# Altium PCB PCB_TUD-EnergyHarvestingConsole_1.pcbdoc (part 1 of 2)
Units mm, origin at the board's own origin, x right, y up, seen from the top; angles counter-clockwise.
Board outline 313.3 x 236.5 mm, 2 copper layers (Top Layer, Bottom Layer); 229 components, 132 nets, 925 pads, 303 vias.
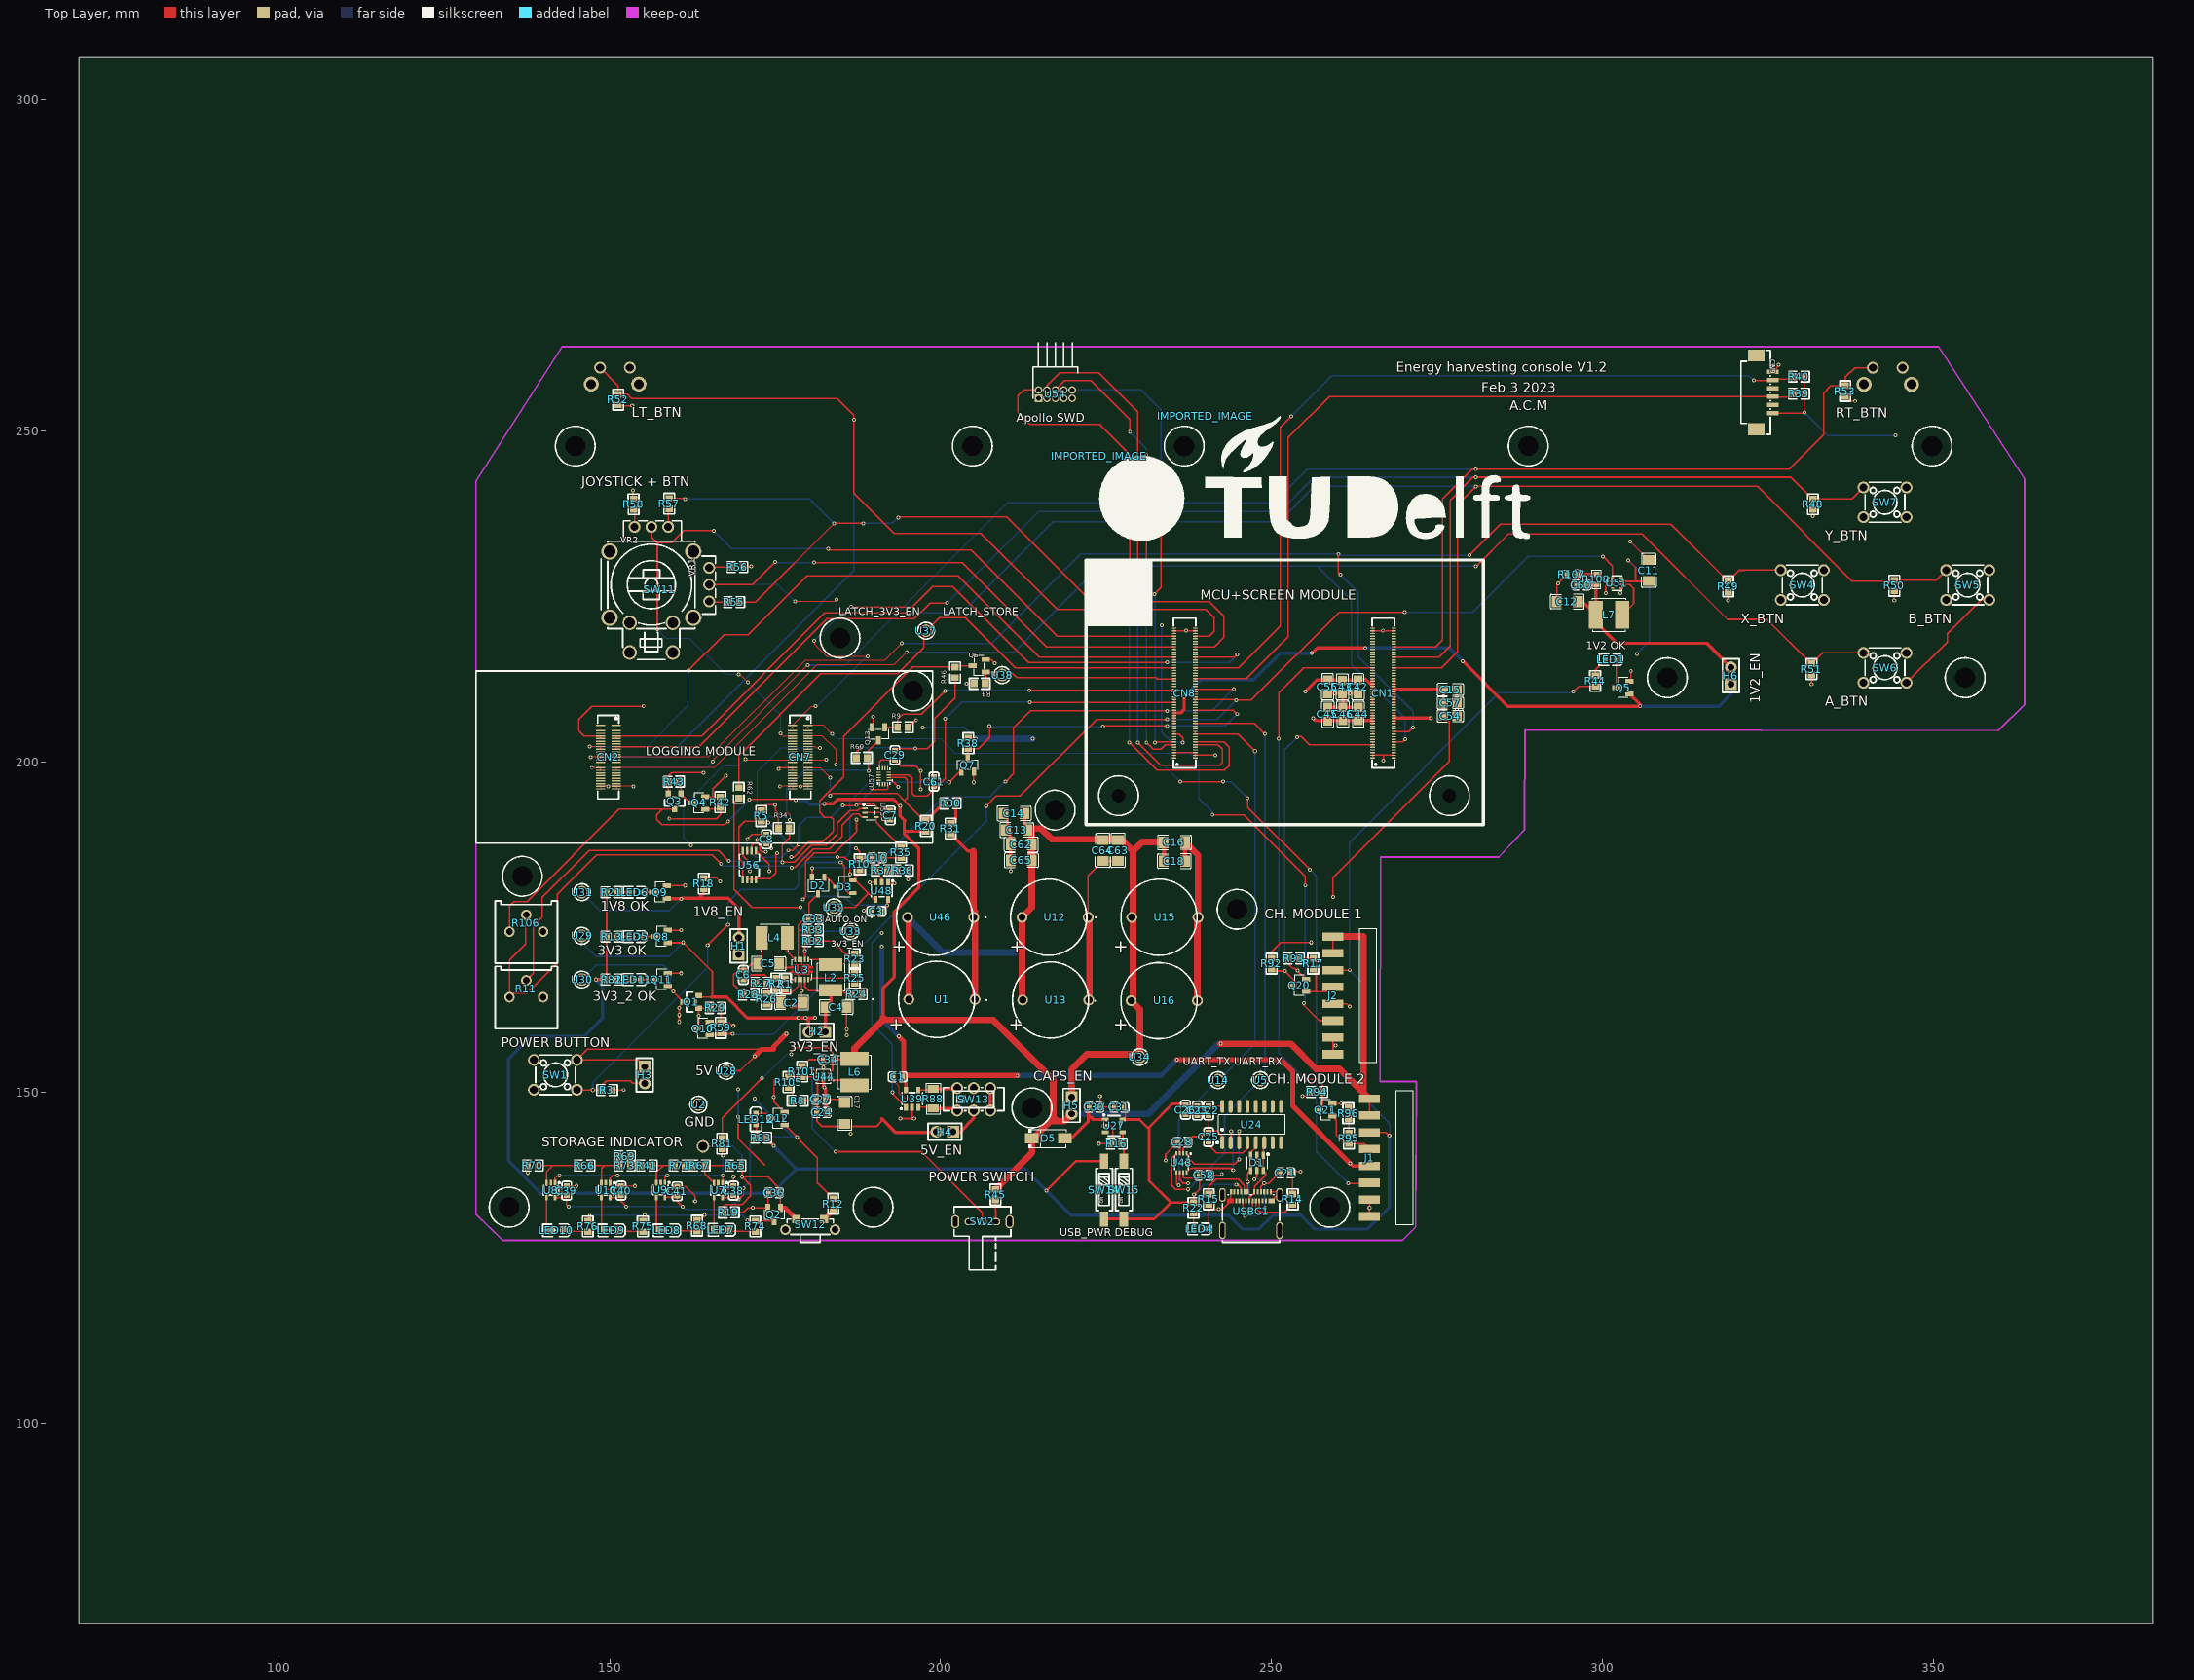
[diagram p0: Top Layer view]
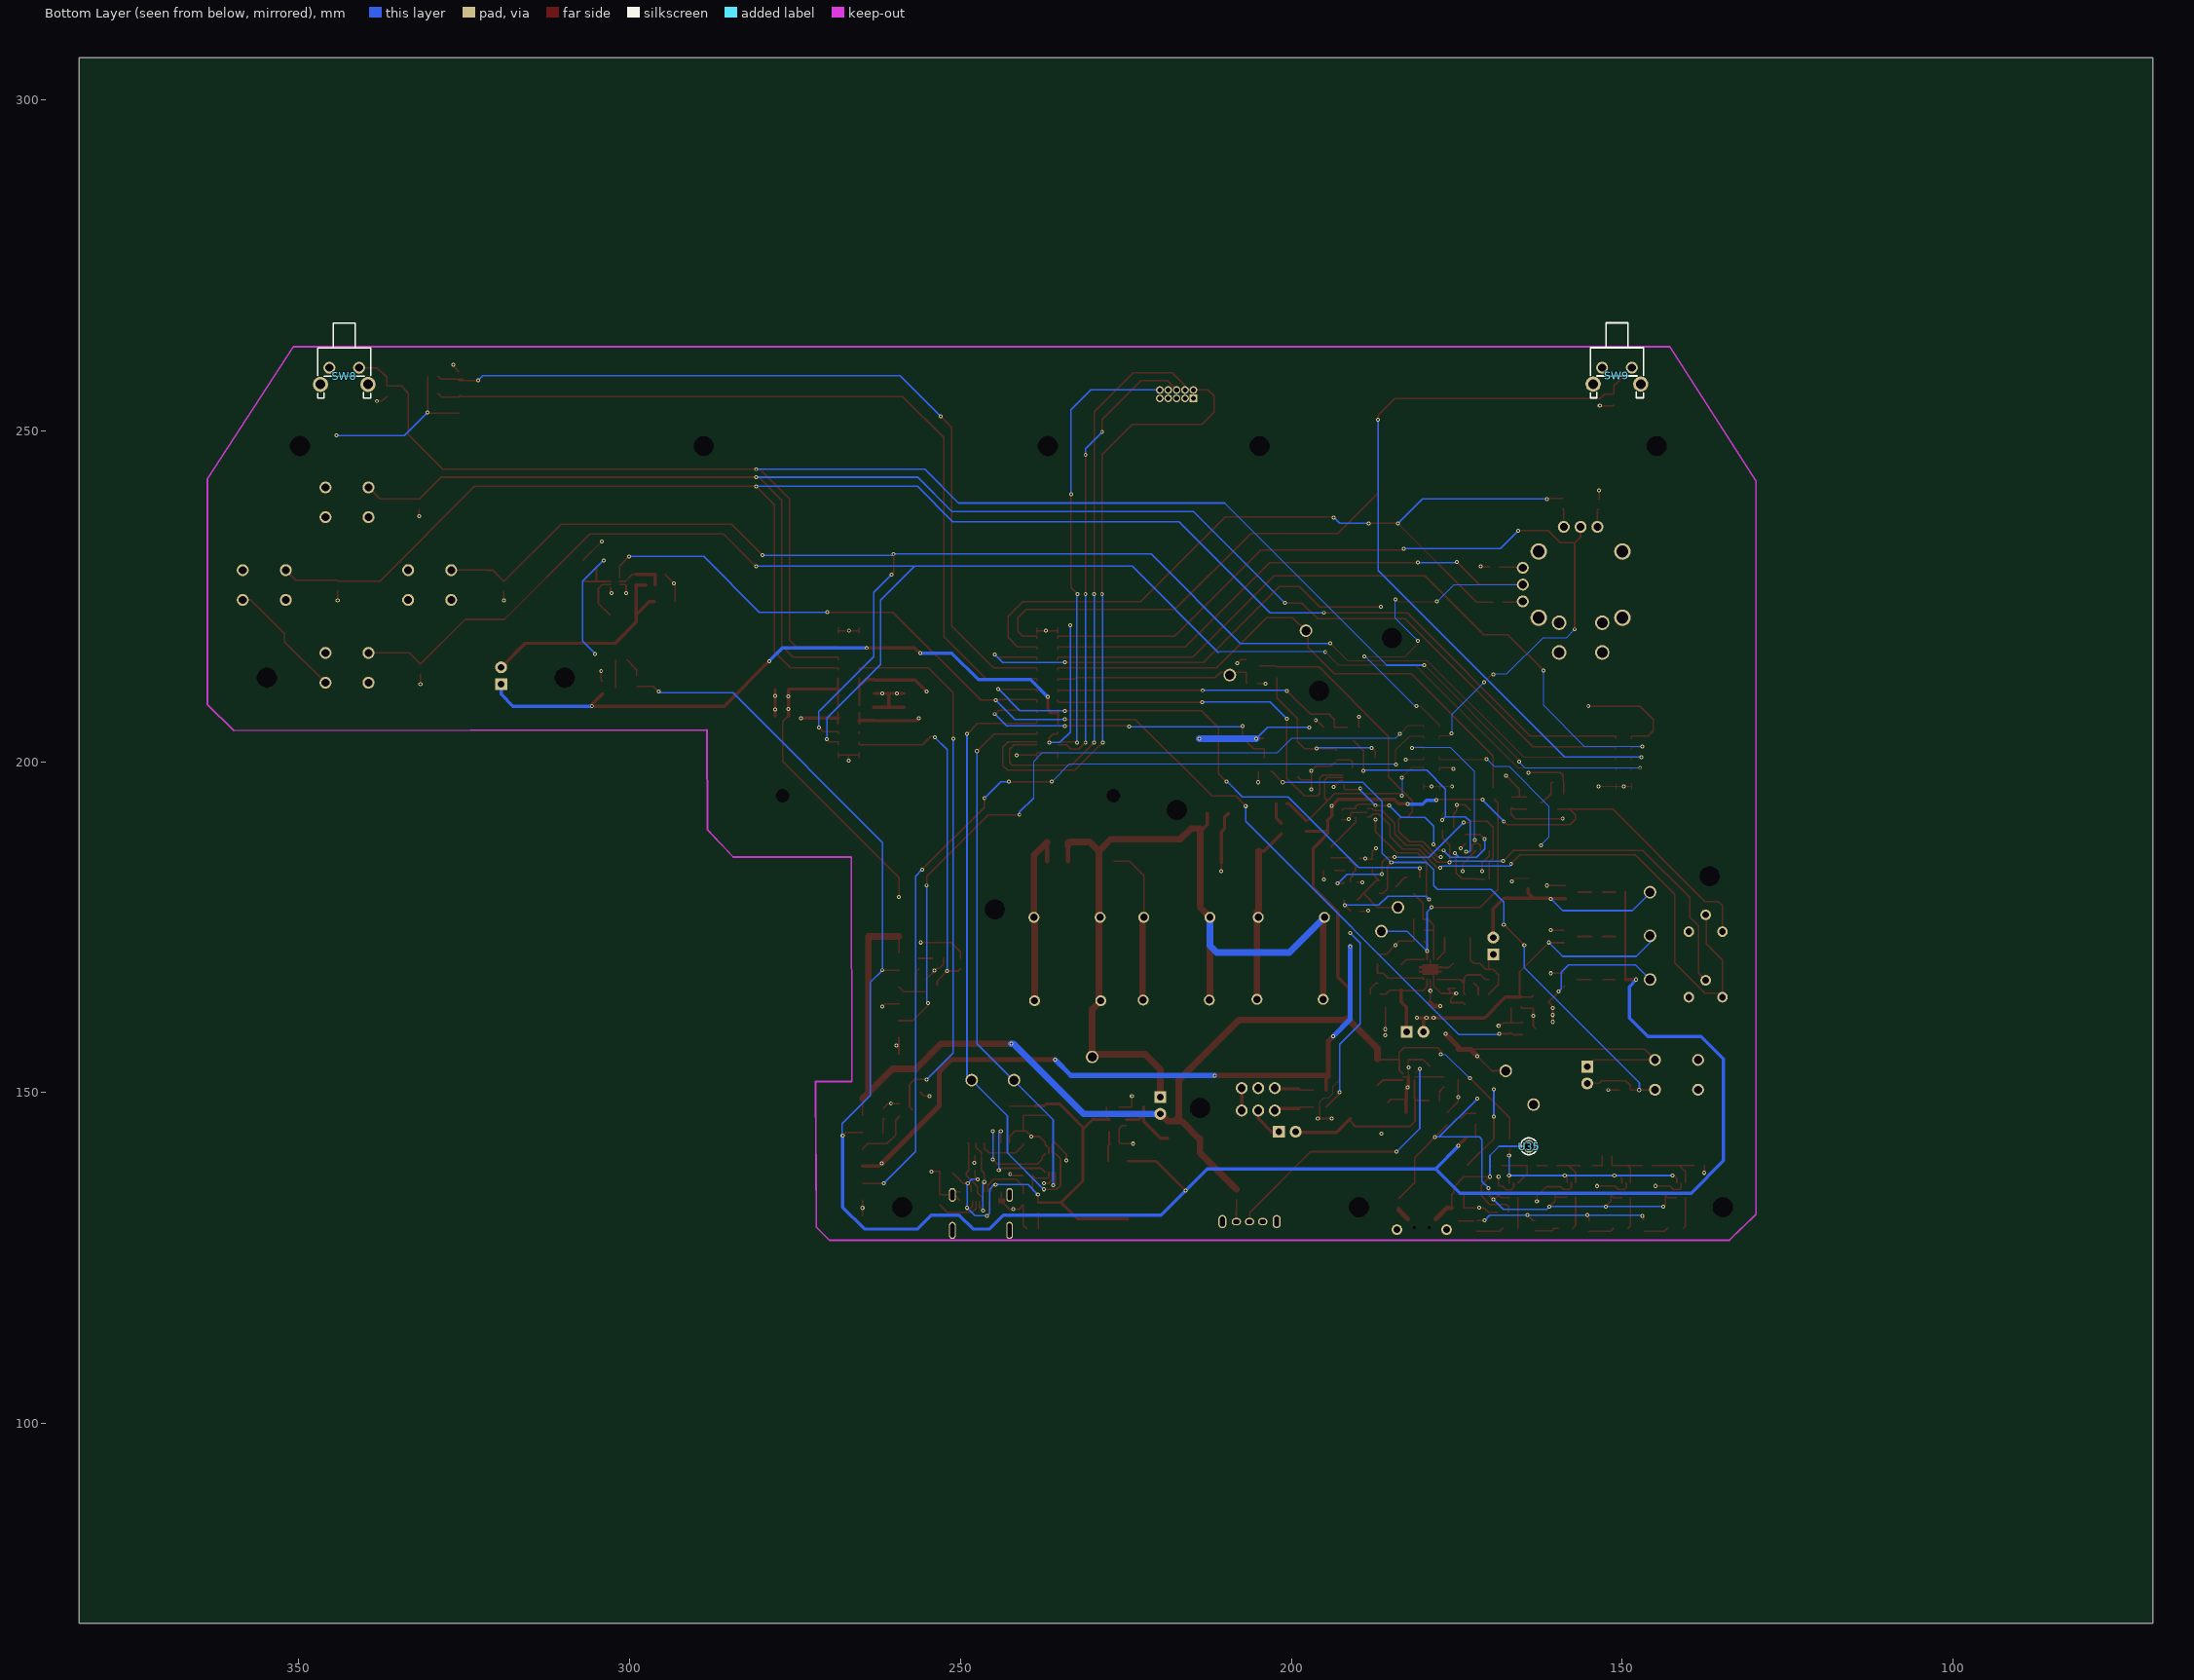
[diagram p1: Bottom Layer view, seen from below]

## Layer stack, top to bottom
Top Layer: signal copper (thickness not stored)
Dielectric: dielectric 0.32, FR-4, Dk 4.8
Bottom Layer: signal copper (thickness not stored)

## Board outline
383.149,69.85 69.85,69.85 69.85,306.35 383.149,306.35
cut-out: 351.299,247.7 ccw(c349.799,247.7) 348.299,247.7 ccw(c349.799,247.7)
cut-out: 311.3,212.7 ccw(c309.8,212.7) 308.3,212.7 ccw(c309.8,212.7)
cut-out: 146.3,247.7 ccw(c144.8,247.7) 143.3,247.7 ccw(c144.8,247.7)
cut-out: 206.3,247.7 ccw(c204.8,247.7) 203.3,247.7 ccw(c204.8,247.7)
cut-out: 290.3,247.7 ccw(c288.8,247.7) 287.3,247.7 ccw(c288.8,247.7)
cut-out: 356.299,212.7 ccw(c354.799,212.7) 353.299,212.7 ccw(c354.799,212.7)
cut-out: 191.3,132.7 ccw(c189.8,132.7) 188.3,132.7 ccw(c189.8,132.7)
cut-out: 136.3,132.7 ccw(c134.8,132.7) 133.3,132.7 ccw(c134.8,132.7)
cut-out: 260.3,132.7 ccw(c258.8,132.7) 257.3,132.7 ccw(c258.8,132.7)
cut-out: 246.3,177.7 ccw(c244.8,177.7) 243.3,177.7 ccw(c244.8,177.7)
cut-out: 238.3,247.7 ccw(c236.8,247.7) 235.3,247.7 ccw(c236.8,247.7)
cut-out: 215.3,147.7 ccw(c213.8,147.7) 212.3,147.7 ccw(c213.8,147.7)
cut-out: 218.8,192.7 ccw(c217.3,192.7) 215.8,192.7 ccw(c217.3,192.7)
cut-out: 138.3,182.7 ccw(c136.8,182.7) 135.3,182.7 ccw(c136.8,182.7)
cut-out: 227.884,194.882 ccw(c226.884,194.882) 225.884,194.882 ccw(c226.884,194.882)
cut-out: 277.884,194.882 ccw(c276.884,194.882) 275.884,194.882 ccw(c276.884,194.882)
cut-out: 197.3,210.7 ccw(c195.8,210.7) 194.3,210.7 ccw(c195.8,210.7)
cut-out: 186.3,218.7 ccw(c184.8,218.7) 183.3,218.7 ccw(c184.8,218.7)

## Components (designator, comment, footprint, x,y, rotation, side; value= is the part's Value field where it differs from the comment)
C1 "100nF" C0603 193.5,152.4 r0 top
C2 "22uF" C1206 177.5,163.6 r0 top
C3 "100nF" C0603 190.3,177.4 r0 top
C4 "22uF" C1206 184.2,162.9 r180 top
C5 "22uF" C1206 174,169.5 r180 top
C6 "33pF" C0603 170.2,167.8 r90 top
C7 "100nF" C0603 192.4,191.9 r90 top
C8 "100nF" C0603 173.7,188.3 r270 top
C10 "100nF" C0603 190.4,185.5 r0 top
C11 "22uF" C1206 307,228.892 r90 top
C12 "22uF" C1206 294.692,224.2 r0 top
C13 "CL31A107MQHNNNE" C1206 211.492,189.7 r180 top
C14 "CL31A107MQHNNNE" C1206 211.1,192.2 r180 top
C15 "CL21A106KAYNNNE" C0805 277,210.9 r180 top
C16 "CL31A107MQHNNNE" C1206 235.327,187.818 r180 top
C17 "CL31A107MQHNNNE" C1206 185.5,146.9 r270 top
C18 "CL31A107MQHNNNE" C1206 235.327,184.981 r0 top
C21 "100nF" C0603 252.1,137.9 r180 top
C22 "4.7uF" C0603 240.5,147.3 r270 top
C23 "4.7uF" C0603 238.8,147.3 r270 top
C24 "4.7uF" C0603 182,147 r180 top
C25 "100nF" C0603 240.5,143.3 r90 top
C26 "100nF" C0603 237,147.4 r270 top
C27 "100nF" C0603 181.9,149 r0 top
C28 "100nF" C0603 236.5,142.5 r0 top
C29 "100nF" C0603 193.1,201 r270 top
C30 "100nF" C0603 223.2,147.8 r0 top
C31 "100nF" C0603 227,147.8 r180 top
C33 "100nF" C0603 180.8,176.2 r0 top
C34 "4.7uF" C0603 183,155 r0 top
C36 "4.7uF" C0603 174.8,134.9 r0 top
C38 "100nF" C0603 168.7,135.2 r90 top
C39 "100nF" C0603 143.5,135.2 r90 top
C40 "100nF" C0603 151.7,135.2 r90 top
C41 "100nF" C0603 160.2,135.1 r90 top
C42 "CL21A106KAYNNNE" C0805 263.055,211.317 r90 top
C43 "CL21A106KAYNNNE" C0805 260.7,211.3 r90 top
C44 "CL21A106KAYNNNE" C0805 263.094,207.217 r270 top
C45 "CL21A106KAYNNNE" C0805 258.5,207.2 r270 top
C46 "CL21A106KAYNNNE" C0805 260.794,207.217 r270 top
C54 "CL21A106KAYNNNE" C0805 277,206.9 r180 top
C55 "CL21A106KAYNNNE" C0805 258.476,211.317 r90 top
C57 "CL21A106KAYNNNE" C0805 277,208.9 r180 top
C58 "100nF" C0603 239.8,137.5 r0 top
C60 "CL10C101JB8NNNC" C0603 296.8,226.7 r0 top
C61 "CL10A105KB8NNNC" C0603 199,197 r270 top
C62 "CL31A107MQHNNNE" C1206 212.192,187.5 r0 top
C63 "CL31A107MQHNNNE" C1206 226.8,186.6 r90 top
C64 "CL31A107MQHNNNE" C1206 224.5,186.592 r90 top
C65 "CL31A107MQHNNNE" C1206 212.192,185.1 r180 top
CN1 "DF40C-100DS-0.4V(51)" CONN-SMD_DF40C-100DS-0.4V-51 266.884,210.382 r270 top
CN2 "DF40C-50DS-0.4V(51)" CONN-SMD_DF40C-50DS-0.4V51 149.8,200.7 r90 top
CN7 "DF40C-50DS-0.4V(51)" CONN-SMD_DF40C-50DS-0.4V51 178.8,200.7 r90 top
CN8 "DF40C-100DS-0.4V(51)" CONN-SMD_DF40C-100DS-0.4V-51 236.884,210.382 r270 top
CN9 "WAFER-MX1.25-6PWB" CONN-SMD_6P-P1.25_XUNPU_WAFER-MX1.25-6PWB 324.5,255.8 r270 top
D1 "USBLC6-2SC6_C2827654" SOT-23-6_L2.9-W1.6-P0.95-LS2.8-BL 247.8,139.4 r180 top
D2 "BAT54C,215" SOT-23-3_L2.9-W1.6-P1.90-LS2.8-BR 181.5,181.3 r90 top
D3 "BAT54C,215" SOT-23-3_L2.9-W1.6-P1.90-LS2.8-BR 185.5,181.1 r0 top
D5 "SS54" SMA_L4.4-W2.8-LS5.4-R-RD 216.3,143.1 r0 top
H1 "HDR-M_2.54_1x2P" HDR-TH_2P-P2.54-V-M-1 169.5,172.17 r90 top
H2 "HDR-M_2.54_1x2P" HDR-TH_2P-P2.54-V-M-1 181.3,159.2 r180 top
H3 "HDR-M_2.54_1x2P" HDR-TH_2P-P2.54-V-M-1 155.3,152.67 r270 top
H4 "HDR-M_2.54_1x2P" HDR-TH_2P-P2.54-V-M-1 200.63,144.1 r180 top
H5 "HDR-M_2.54_1x2P" HDR-TH_2P-P2.54-V-M-1 219.8,148.07 r270 top
H6 "HDR-M_2.54_1x2P" HDR-TH_2P-P2.54-V-M-1 319.4,213 r90 top
IMPORTED_IMAGE "IMPORTED_IMAGE" IMPORTED_IMAGE 240,252.2 r0 top
IMPORTED_IMAGE "IMPORTED_IMAGE" IMPORTED_IMAGE 223.993,246.207 r0 top
J1 "TSM-108-02-F-SH" TSM-108-YY-ZZZ-SH 264.8,140.2 r270 top
J2 "TSM-108-02-F-SH" TSM-108-YY-ZZZ-SH 259.3,164.7 r270 top
L2 "2.2uH" IND-SMD_L4.0-W4.0_SMNR4020 183.4,167.4 r270 top
L4 "2.2uH" IND-SMD_L4.0-W4.0_SMNR4020 174.9,173.4 r0 top
L6 "SWPA5040S4R7NT" IND-SMD_L5.0-W5.0 187,153.1 r90 top
L7 "CR5020-R47N" IND-SMD_L5.0-W5.0 301,222.2 r0 top
LED1 "KT-0603R" LED0603-R-RD 301.249,215.4 r180 top
LED4 "KT-0603R" LED0603-R-RD 239.1,129.4 r180 top
LED5 "KT-0603R" LED0603-R-RD 153.8,173.6 r180 top
LED6 "KT-0603R" LED0603-R-RD 153.8,180.3 r180 top
LED7 "17-21SUYC/TR8" LED0805-RD 166.9,129.3 r180 top
LED8 "17-21SUYC/TR8" LED0805-RD 158.6,129.2 r180 top
LED9 "17-21SUYC/TR8" LED0805-RD 150.233,129.2 r180 top
LED10 "17-21SUYC/TR8" LED0805-RD 141.9,129.2 r180 top
LED11 "KT-0603R" LED0603-R-RD 153.8,167.1 r180 top
LED12 "KT-0603R" LED0603-R-RD 172.1,146 r270 top
Q1 "AO3401A" SOT-23_L2.9-W1.3-P1.90-LS2.4-BR 162.3,163.7 r0 top
Q2 "AO3400A" SOT-23-3_L2.9-W1.3-P1.90-LS2.4-BR 174.85,131.6 r90 top
Q3 "AO3401A" SOT-23_L2.9-W1.3-P1.90-LS2.4-BR 159.8,194 r90 top
Q4 "AO3400A" SOT-23-3_L2.9-W1.3-P1.90-LS2.4-BR 163.471,193.771 r0 top
Q5 "AO3400A" SOT-23-3_L2.9-W1.3-P1.90-LS2.4-BR 303.1,211.2 r0 top
Q6 "AO3400A_C700953" SOT-23-3_L2.9-W1.3-P1.90-LS2.4-BR 205.8,214.5 r0 top
Q7 "AO3400A_C700953" SOT-23-3_L2.9-W1.3-P1.90-LS2.4-BR 204.1,199.5 r270 top
Q8 "AO3400A" SOT-23-3_L2.9-W1.3-P1.90-LS2.4-BR 157.8,173.6 r0 top
Q9 "AO3400A" SOT-23-3_L2.9-W1.3-P1.90-LS2.4-BR 157.6,180.3 r0 top
Q10 "AO3400A" SOT-23-3_L2.9-W1.3-P1.90-LS2.4-BR 164.1,159.7 r0 top
Q11 "AO3400A" SOT-23-3_L2.9-W1.3-P1.90-LS2.4-BR 157.8,167.1 r0 top
Q12 "AO3400A" SOT-23-3_L2.9-W1.3-P1.90-LS2.4-BR 175.4,146.1 r0 top
Q13 "AO3400A_C700953" SOT-23-3_L2.9-W1.3-P1.90-LS2.4-BR 190.6,204.2 r90 top
Q20 "AO3400A" SOT-23-3_L2.9-W1.3-P1.90-LS2.4-BR 254.2,166.2 r0 top
Q21 "AO3400A" SOT-23-3_L2.9-W1.3-P1.90-LS2.4-BR 258.2,147.4 r0 top
R1 "5.1MΩ" R0603#1 176.5,166.453 r270 top
R2 "5.1MΩ" R0603#1 175.2,166.5 r270 top
R3 "200kΩ" R0603#1 149.6,150.4 r180 top
R4 "1MΩ" R0603#1 205.9,211.8 r180 top
R5 "5.1MΩ" R0603#1 172.9,191.8 r90 top
R8 "3MΩ" R0603#1 178.4,148.8 r0 top
R9 "1MΩ" R0603#1 194.3,205.2 r0 top
R10 "5.1MΩ" R0603#1 187.8,184.5 r90 top
R11 "3386P-1-205LF" RES-ADJ-TH_3P-L9.5-W9.5-P2.54-BR-BS 137.4,165.7 r270 top
R12 "470Ω" R0603#1 183.8,133.2 r90 top
R13 "1kΩ" R0603#1 150.3,173.6 r180 top
R14 "5.1K" R0603#1 253.2,133.9 r270 top
R15 "5.1K" R0603#1 240.5,133.9 r270 top
R16 "5.1K" R0603#1 226.6,142.3 r0 top
R17 "5.1MΩ" R0603#1 256.3,169.5 r90 top
R18 "5.1MΩ" R0603#1 164.2,181.6 r90 top
R19 "200kΩ" R0603#1 168,131.9 r0 top
R20 "3MΩ" R0603#1 197.8,190.3 r270 top
R21 "1kΩ" R0603#1 150.3,180.3 r180 top
R22 "1kΩ" R0603#1 238.2,132.6 r270 top
R23 "200kΩ" R0603#1 187,170.2 r270 top
R24 "470kΩ" R0603#1 187.3,164.9 r180 top
R25 "470kΩ" R0603#1 187,167.3 r270 top
R26 "200kΩ" R0603#1 173.7,164.146 r90 top
R27 "200kΩ" R0603#1 172.9,166.6 r180 top
R28 "200kΩ" R0603#1 171,164.8 r180 top
R29 "5.1MΩ" R0603#1 166,162.8 r180 top
R30 "470kΩ" R0603#1 201.5,193.7 r0 top
R31 "200kΩ" R0603#1 201.5,189.9 r90 top
R32 "5.1MΩ" R0603#1 180.7,172.9 r0 top
R33 "5.1MΩ" R0603#1 180.7,174.6 r0 top
R34 "200kΩ" R0603#1 176.3,190 r0 top
R35 "1MΩ" R0603#1 194,186.3 r90 top
R36 "5.1MΩ" R0603#1 194.3,183.6 r0 top
R37 "5.1MΩ" R0603#1 191.1,183.6 r0 top
R38 "200kΩ" R0603#1 204.2,202.8 r270 top
R39 "20kΩ" R0603#1 329.699,255.6 r180 top
R40 "20kΩ" R0603#1 329.699,258.2 r180 top
R41 "1MΩ" R0603#1 155.6,139 r0 top
R42 "5.1MΩ" R0603#1 166.7,193.9 r90 top
R43 "5.1MΩ" R0603#1 159.7,197 r180 top
R44 "1kΩ" R0603#1 298.9,212.2 r270 top
R45 "20kΩ" R0603#1 208.3,134.6 r270 top
R46 "200kΩ" R0603#1 202.2,213.5 r90 top
R48 "200kΩ" R0603#1 331.799,238.9 r90 top
R49 "200kΩ" R0603#1 319,226.5 r90 top
R50 "200kΩ" R0603#1 344.099,226.6 r90 top
R51 "200kΩ" R0603#1 331.599,214 r90 top
R52 "200kΩ" R0603#1 151.3,254.7 r90 top
R53 "200kΩ" R0603#1 336.699,256 r90 top
R55 "20kΩ" R0603#1 168.8,224.1 r0 top
R56 "20kΩ" R0603#1 169.3,229.4 r0 top
R57 "20kΩ" R0603#1 159,239 r90 top
R58 "20kΩ" R0603#1 153.6,238.9 r90 top
R59 "5.1MΩ" R0603#1 166.8,159.8 r90 top
R60 "200kΩ" R0603#1 188.1,200.6 r0 top
R62 "200kΩ" R0603#1 169.5,195.3 r270 top
R65 "200kΩ" R0603#1 169,139 r0 top
R66 "3MΩ" R0603#1 146.2,139 r0 top
R67 "200kΩ" R0603#1 163.6,139 r0 top
R68 "10kΩ" R0603#1 163.2,129.9 r90 top
R69 "1MΩ" R0603#1 152.3,140.4 r0 top
R70 "200kΩ" R0603#1 138.4,139 r0 top
R71 "1MΩ" R0603#1 160.6,139 r0 top
R73 "1MΩ" R0603#1 152.3,139 r0 top
R74 "10kΩ" R0603#1 172,129.8 r90 top
R75 "10kΩ" R0603#1 155,129.8 r90 top
R76 "10kΩ" R0603#1 146.7,129.8 r90 top
R81 "5.1MΩ" R0603#1 167,142.3 r270 top
R82 "1kΩ" R0603#1 150.3,167.1 r180 top
R83 "1kΩ" R0603#1 172.9,143.2 r0 top
R88 "PT1206FR-7W0R2L" R1206 198.9,149.1 r270 top
R92 "5.1MΩ" R0603#1 250,169.5 r270 top
R93 "5.1MΩ" R0603#1 253.4,170.3 r180 top
R94 "5.1MΩ" R0603#1 256.9,150.1 r0 top
R95 "5.1MΩ" R0603#1 261.7,143.1 r90 top
R96 "5.1MΩ" R0603#1 261.6,146.9 r90 top
R101 "1MΩ" R0603#1 179.1,153.2 r270 top
R105 "200kΩ" R0603#1 177,151.6 r90 top
R106 "3386P-1-205LF" RES-ADJ-TH_3P-L9.5-W9.5-P2.54-BR-BS 137.4,175.6 r270 top
R107 "0603WAF1003T5E" R0603#2 295.4,228.3 r0 top
R108 "0603WAF1003T5E" R0603#2 299.1,227.553 r270 top
SW1 "TS665CJ" SW-TH_4P-L6.0-W6.0-P4.50-LS6.5 141.8,152.7 r0 top
SW2 "SK-12D02-VG5" SW-TH_SK-12D02-VG5 206.322,130.513 r0 top
SW4 "TS665CJ" SW-TH_4P-L6.0-W6.0-P4.50-LS6.5 330.199,226.7 r0 top
SW5 "TS665CJ" SW-TH_4P-L6.0-W6.0-P4.50-LS6.5 355.199,226.7 r0 top
SW6 "TS665CJ" SW-TH_4P-L6.0-W6.0-P4.50-LS6.5 342.699,214.2 r0 top
SW7 "TS665CJ" SW-TH_4P-L6.0-W6.0-P4.50-LS6.5 342.699,239.2 r0 top
SW8 "TS-1093C-A9B3-D1" SW-TH_TS-1093C-A9B3-D1 343.109,258.271 r0 bottom
SW9 "TS-1093C-A9B3-D1" SW-TH_TS-1093C-A9B3-D1 150.8,258.3 r0 bottom
SW11 "THB001P" SW-TH_THB001P 157.5,226 r0 top
SW12 "K2-1112SW-A4SW-04" KEY-TH_K2-1112SW-AXXW-XX 180.3,130.1 r270 top
SW13 "K3-2235D-F1" SW-TH_K3-2235D-F1 205,149 r0 top
SW14 "DSIC01LSGET" SW-SMD_DSIC01LSGET 224.7,135.3 r180 top
SW15 "DSIC01LSGET" SW-SMD_DSIC01LSGET 227.7,135.3 r180 top
U1 "KR-5R5H224-R" KR5R5H224R 195.2,164.1 r0 top
U2 "5001" TEST-TH_BD2.54-P1.39 163.4,148.2 r0 top
U3 "TPS62400DRCR_C138724" VSON-10_L3.0-W3.0-P0.50-TL-EP 179,168.6 r90 top
U5 "5001" TEST-TH_BD2.54-P1.39 248.3,151.9 r0 top
U7 "TLV3691IDCKR" SC-70-5_L2.1-W1.3-P0.65-LS2.1-BR 166.4,135.251 r90 top
U8 "TLV3691IDCKR" SC-70-5_L2.1-W1.3-P0.65-LS2.1-BR 141.1,135.251 r90 top
U9 "TLV3691IDCKR" SC-70-5_L2.1-W1.3-P0.65-LS2.1-BR 157.7,135.3 r90 top
U10 "TLV3691IDCKR" SC-70-5_L2.1-W1.3-P0.65-LS2.1-BR 149.4,135.251 r90 top
U12 "KR-5R5H224-R" KR5R5H224R 212.3,176.5 r0 top
U13 "KR-5R5H224-R" KR5R5H224R 212.4,164 r0 top
U14 "5001" TEST-TH_BD2.54-P1.39 241.9,151.9 r0 top
U15 "KR-5R5H224-R" KR5R5H224R 228.9,176.5 r0 top
U16 "KR-5R5H224-R" KR5R5H224R 228.8,163.9 r0 top
U24 "CH340B" SOIC-16_L9.9-W3.9-P1.27-LS6.0-BL 247,145.2 r0 top
U27 "TPS2051BDBVR" SOT-23-5_L3.0-W1.7-P0.95-LS2.8-BR 226.2,145 r180 top
U28 "5001" TEST-TH_BD2.54-P1.39 167.6,153.3 r0 top
U29 "5001" TEST-TH_BD2.54-P1.39 145.8,173.7 r0 top
U30 "5001" TEST-TH_BD2.54-P1.39 145.8,167.1 r0 top
U31 "5001" TEST-TH_BD2.54-P1.39 145.8,180.3 r0 top
U32 "5001" TEST-TH_BD2.54-P1.39 183.9,178 r0 top
U33 "5001" TEST-TH_BD2.54-P1.39 186.4,174.4 r0 top
U34 "5001" TEST-TH_BD2.54-P1.39 230.1,155.4 r0 top
U35 "5001" TEST-TH_BD2.54-P1.39 164.1,141.9 r180 bottom
U37 "5001" TEST-TH_BD2.54-P1.39 197.8,219.8 r0 top
U38 "5001" TEST-TH_BD2.54-P1.39 209.3,213.1 r0 top
U39 "INA180A3IDBVR" SOT-23-5_L3.0-W1.7-P0.95-LS2.8-BR 195.7,149.1 r270 top
U43 "TXS0102DCUR" US-8_L2.4-W2.1-P0.50-LS3.2-BR 236.4,139.4 r90 top
U44 "LTC3526LEDC#TRPBF" DFN-6_L2.0-W2.0-P0.50-BL-EP 182.3,152.4 r90 top
U46 "KR-5R5H224-R" KR5R5H224R 195,176.5 r0 top
U48 "SN74AHCT1G08DBVR_C113521" SOT-23-5_L3.0-W1.7-P0.95-LS2.8-BR 191.1,180.5 r90 top
U51 "TPS62821DLCT" VSON-8_L2.0-W1.5-P0.50-BL 302.2,227 r270 top
U54 "M50-3900542_" HDRRA10W40P127_2X5_635X100X340 214.8,254.9 r0 top
U55 "MIC841HYC5-TR" SC-70-5_L2.1-W1.3-P0.65-LS2.1-BL 189.4,192.3 r270 top
U56 "TC7W74FU,LF" TSSOP-8_L3.0-W3.0-P0.65-LS4.9-BR 171.1,184.4 r90 top
U57 "TMUX1511RSVR" UTQFN-16_L2.6-W1.8-P0.40-BL 191.4,197.8 r90 top
USBC1 "105450-0101" USB-C-SMD_TYPE-C-USB-18 246.9,132.1 r0 top

## Footprints (in the part's own frame and the unit in brackets; to place one, negate y for a bottom-side part, rotate by r counter-clockwise, add the part's x,y. Pads: shape width x height; smd on the part's side, far side on the other; paste and mask are expansions set on the pad)
C0603 [mm]
  rect 0.8x0.9 smd paste+0 mask+0.051: 1(-0.7,0) 2(0.7,0)
  silkscreen extent -1.41,-0.71 1.39,0.72
C0805 [mm]
  rect 1.41x1.35 smd paste-100 mask+0.051: 1(-1,0) 2(1,0)
  silkscreen extent -1.96,-0.9 1.96,0.9
C1206 [mm]
  rect 1.485x1.728 smd paste-100 mask+0.051: 1(-1.593,0) 2(1.593,0)
  silkscreen extent -2.56,-1.09 2.56,1.09
CONN-SMD_6P-P1.25_XUNPU_WAFER-MX1.25-6PWB [mm]
  rect 0.7x1.7 smd paste+0 mask+0.05: 1(-3.125,1.25) 2(-1.875,1.25) 3(-0.625,1.25) 4(0.625,1.25) 5(1.875,1.25) 6(3.125,1.25)
  rect 1.8x2.5 smd paste+0 mask+0.05: 7(5.575,-1.25) 8(-5.575,-1.25)
  silkscreen extent -6.35,-3.56 6.35,1.52
CONN-SMD_DF40C-50DS-0.4V51 [mm]
  rect 0.2x1.4 smd paste+0 mask+0.051: 1(4.8,-1.19) 2(4.8,1.19) 3(4.4,-1.19) 4(4.4,1.19) 5(4,-1.19) 6(4,1.19) 7(3.6,-1.19) 8(3.6,1.19) 9(3.2,-1.19) 10(3.2,1.19) 11(2.8,-1.19) 12(2.8,1.19) 13(2.4,-1.19) 14(2.4,1.19) 15(2,-1.19) 16(2,1.19) 17(1.6,-1.19) 18(1.6,1.19) 19(1.2,-1.19) 20(1.2,1.19) 21(0.8,-1.19) 22(0.8,1.19) 23(0.4,-1.19) 24(0.4,1.19) 25(0,-1.19) 26(0,1.19) 27(-0.4,-1.19) 28(-0.4,1.19) 29(-0.8,-1.19) 30(-0.8,1.19) 31(-1.2,-1.19) 32(-1.2,1.19) 33(-1.6,-1.19) 34(-1.6,1.19) 35(-2,-1.19) 36(-2,1.19) 37(-2.4,-1.19) 38(-2.4,1.19) 39(-2.8,-1.19) 40(-2.8,1.19) 41(-3.2,-1.19) 42(-3.2,1.19) 43(-3.6,-1.19) 44(-3.6,1.19) 45(-4,-1.19) 46(-4,1.19) 47(-4.4,-1.19) 48(-4.4,1.19) 49(-4.8,-1.19) 50(-4.8,1.19)
  silkscreen extent -6.3,-1.6 6.3,1.6
CONN-SMD_DF40C-100DS-0.4V-51 [mm]
  rect 0.2x0.7 smd paste+0 mask+0.051: 1(9.8,-1.6) 2(9.4,-1.6) 3(9,-1.6) 4(8.6,-1.6) 5(8.2,-1.6) 6(7.8,-1.6) 7(7.4,-1.6) 8(7,-1.6) 9(6.6,-1.6) 10(6.2,-1.6) 11(5.8,-1.6) 12(5.4,-1.6) 13(5,-1.6) 14(4.6,-1.6) 15(4.2,-1.6) 16(3.8,-1.6) 17(3.4,-1.6) 18(3,-1.6) 19(2.6,-1.6) 20(2.2,-1.6) 21(1.8,-1.6) 22(1.4,-1.6) 23(1,-1.6) 24(0.6,-1.6) 25(0.2,-1.6) 26(-0.2,-1.6) 27(-0.6,-1.6) 28(-1,-1.6) 29(-1.4,-1.6) 30(-1.8,-1.6) 31(-2.2,-1.6) 32(-2.6,-1.6) 33(-3,-1.6) 34(-3.4,-1.6) 35(-3.8,-1.6) 36(-4.2,-1.6) 37(-4.6,-1.6) 38(-5,-1.6) 39(-5.4,-1.6) 40(-5.8,-1.6) 41(-6.2,-1.6) 42(-6.6,-1.6) 43(-7,-1.6) 44(-7.4,-1.6) 45(-7.8,-1.6) 46(-8.2,-1.6) 47(-8.6,-1.6) 48(-9,-1.6) 49(-9.4,-1.6) 50(-9.8,-1.6) 51(-9.8,1.6) 52(-9.4,1.6) 53(-9,1.6) 54(-8.6,1.6) 55(-8.2,1.6) 56(-7.8,1.6) 57(-7.4,1.6) 58(-7,1.6) 59(-6.6,1.6) 60(-6.2,1.6) 61(-5.8,1.6) 62(-5.4,1.6) 63(-5,1.6) 64(-4.6,1.6) 65(-4.2,1.6) 66(-3.8,1.6) 67(-3.4,1.6) 68(-3,1.6) 69(-2.6,1.6) 70(-2.2,1.6) 71(-1.8,1.6) 72(-1.4,1.6) 73(-1,1.6) 74(-0.6,1.6) 75(-0.2,1.6) 76(0.2,1.6) 77(0.6,1.6) 78(1,1.6) 79(1.4,1.6) 80(1.8,1.6) 81(2.2,1.6) 82(2.6,1.6) 83(3,1.6) 84(3.4,1.6) 85(3.8,1.6) 86(4.2,1.6) 87(4.6,1.6) 88(5,1.6) 89(5.4,1.6) 90(5.8,1.6) 91(6.2,1.6) 92(6.6,1.6) 93(7,1.6) 94(7.4,1.6) 95(7.8,1.6) 96(8.2,1.6) 97(8.6,1.6) 98(9,1.6) 99(9.4,1.6) 100(9.8,1.6)
  silkscreen extent -11.3,-1.69 11.3,1.69
DFN-6_L2.0-W2.0-P0.50-BL-EP [mm]
  rect 0.28x0.585 smd paste+0 mask+0.051: 1(-0.5,-0.917) 2(0,-0.917) 3(0.5,-0.917) 4(0.5,0.917) 5(0,0.917) 6(-0.5,0.917)
  rect 1.37x0.56 smd paste+0 mask+0.051: 7(0,0)
  silkscreen extent -1.08,-1.58 1.08,1.08
HDR-TH_2P-P2.54-V-M-1 [mm]
  rect 1.8x1.8 hole 1 paste+0 mask+0.051: 1(-1.27,0)
  round 1.8 hole 1 paste+0 mask+0.051: 2(1.27,0)
  silkscreen extent -2.54,-1.27 2.54,1.27
HDRRA10W40P127_2X5_635X100X340 [mm]
  rect 1.15x1.15 hole 0.75 paste+0 mask+0.102: 1(0,0)
  round 1.15 hole 0.75 paste+0 mask+0.102: 2(0,1.27) 3(1.27,0) 4(1.27,1.27) 5(2.54,0) 6(2.54,1.27) 7(3.81,0) 8(3.81,1.27) 9(5.08,0) 10(5.08,1.27)
  silkscreen extent -0.83,0 5.91,8.44
IMPORTED_IMAGE [mm]
  silkscreen extent 0,-18.51 49.1,0
IND-SMD_L4.0-W4.0_SMNR4020 [mm]
  rect 1.874x3.52 smd paste+0 mask+0.051: 1(1.928,0) 2(-1.928,0)
  silkscreen extent -2.1,-2.08 2.1,2.08
IND-SMD_L5.0-W5.0 [mm]
  rect 2.124x4.22 smd paste+0 mask+0.051: 1(2,0) 2(-2,0)
  silkscreen extent -2.53,-2.53 2.53,2.53
KEY-TH_K2-1112SW-AXXW-XX [mm]
  rect 1.2x1.2 smd paste-100 mask+0.051: 1(-0.8,-2.1) 2(-0.8,2.1)
  round 1.6 hole 1 paste+0 mask+0.051: 3(0.8,3.75) 4(0.8,-3.75)
  Multi-Layer board cut-out: 0.5,-0.912 0.397,-0.936 0.314,-1.002 0.268,-1.097 0.268,-1.203 0.314,-1.298 0.397,-1.364 0.5,-1.387 0.5,-1.387 0.603,-1.364 0.686,-1.298 0.732,-1.203 0.732,-1.097 0.686,-1.002 0.603,-0.936 0.5,-0.912
  Multi-Layer board cut-out: 0.5,1.388 0.397,1.364 0.314,1.298 0.268,1.203 0.268,1.097 0.314,1.002 0.397,0.936 0.5,0.913 0.5,0.913 0.603,0.936 0.686,1.002 0.732,1.097 0.732,1.203 0.686,1.298 0.603,1.364 0.5,1.388
  silkscreen extent -0.8,-3.5 2.7,3.5
KR5R5H224R [mm]
  round 1.65 hole 1.1 paste+0 mask+0.102: 1(0,0) 2(10,0)
  silkscreen extent -5.5,-0.05 -5.4,0.05
LED0603-R-RD [mm]
  rect 0.8x0.8 smd paste+0 mask+0.051: 1(0.851,0) 2(-0.851,0)
  silkscreen extent -1.82,-0.86 1.77,0.86
LED0805-RD [mm]
  rect 1x1.25 smd paste+0 mask+0.051: 1(-1.1,0) 2(1.1,0)
  silkscreen extent -2.1,-0.95 1.98,0.96
R0603#1 [mm]
  rect 1x1.1 smd paste+0 mask+0.051: 1(-0.8,0) 2(0.8,0)
  silkscreen extent -1.55,-0.8 1.55,0.81
R0603#2 [mm]
  rect 0.806x0.864 smd paste-100 mask+0.051: 1(-0.753,0) 2(0.753,0)
  silkscreen extent -1.39,-0.66 1.39,0.66
R1206 [mm]
  rect 1.208x1.701 smd paste-100 mask+0.051: 1(-1.479,0) 2(1.479,0)
  silkscreen extent -2.31,-1.08 2.31,1.08
RES-ADJ-TH_3P-L9.5-W9.5-P2.54-BR-BS [mm]
  round 1.6 hole 1 paste+0 mask+0.051: 1(1.27,-2.54) 2(-1.27,0) 3(1.27,2.54)
  silkscreen extent -3.38,-4.7 6.02,4.7
SC-70-5_L2.1-W1.3-P0.65-LS2.1-BL [mm]
  rect 0.315x0.835 smd paste+0 mask+0.051: 1(-0.65,-0.843) 2(0,-0.843) 3(0.65,-0.843) 4(0.65,0.842) 5(-0.65,0.842)
  silkscreen extent -1.41,-1.14 1.08,0.7
SC-70-5_L2.1-W1.3-P0.65-LS2.1-BR [mm]
  rect 0.9x0.4 smd paste+0 mask+0.051: 1(1.1,-0.65) 2(1.1,0) 3(1.1,0.65) 4(-1.1,0.65) 5(-1.1,-0.65)
  silkscreen extent -0.7,-1.4 1.27,1.15
SMA_L4.4-W2.8-LS5.4-R-RD [mm]
  rect 2.063x1.539 smd paste+0 mask+0.051: 1(2.504,0) 2(-2.504,0)
  silkscreen extent -3.03,-1.43 2.65,1.43
SOIC-16_L9.9-W3.9-P1.27-LS6.0-BL [mm]
  oval 0.602x1.971 smd paste+0 mask+0.051: 1(-4.445,-2.736) 2(-3.175,-2.736) 3(-1.905,-2.736) 4(-0.635,-2.736) 5(0.635,-2.736) 6(1.905,-2.736) 7(3.175,-2.736) 8(4.445,-2.736) 9(4.445,2.736) 10(3.175,2.736) 11(1.905,2.736) 12(0.635,2.736) 13(-0.635,2.736) 14(-1.905,2.736) 15(-3.175,2.736) 16(-4.445,2.736)
  silkscreen extent -5.35,-2.89 5.03,1.52
SOT-23-3_L2.9-W1.3-P1.90-LS2.4-BR [mm]
  rect 1.25x0.7 smd paste+0 mask+0.051: 1(1,-0.95) 2(1,0.95) 3(-1,0)
  silkscreen extent -0.73,-1.53 0.73,1.53
SOT-23-3_L2.9-W1.6-P1.90-LS2.8-BR [mm]
  rect 1.07x0.6 smd paste+0 mask+0.051: 1(1.235,-0.95) 2(1.235,0.95) 3(-1.235,0)
  silkscreen extent -0.88,-1.54 0.88,1.54
SOT-23-5_L3.0-W1.7-P0.95-LS2.8-BR [mm]
  rect 1x0.6 smd paste+0 mask+0.051: 1(1.3,-0.95) 2(1.3,0) 3(1.3,0.95) 4(-1.3,0.95) 5(-1.3,-0.95)
  silkscreen extent -0.9,-1.78 1.65,1.55
SOT-23-6_L2.9-W1.6-P0.95-LS2.8-BL [mm]
  rect 0.532x1.072 smd paste+0 mask+0.051: 1(-0.95,-1.149) 2(0,-1.149) 3(0.95,-1.149) 4(0.95,1.149) 5(0,1.149) 6(-0.95,1.149)
  silkscreen extent -1.82,-1.45 1.54,0.89
SOT-23_L2.9-W1.3-P1.90-LS2.4-BR [mm]
  rect 1x0.8 smd paste+0 mask+0.051: 1(1.15,-0.95) 2(1.15,0.95) 3(-1.15,0)
  silkscreen extent -0.7,-1.5 0.7,1.5
SW-SMD_DSIC01LSGET [mm]
  rect 1.3x2.3 smd paste+0 mask+0.051: 1(0,4.375) 2(0,-4.375)
  silkscreen extent -1.27,-3.24 1.27,3.11
SW-TH_4P-L6.0-W6.0-P4.50-LS6.5 [mm]
  round 1.8 hole 1.2 paste+0 mask+0.051: 1(-3.25,2.25) 2(3.25,2.25) 3(-3.25,-2.25) 4(3.25,-2.25)
  silkscreen extent -3,-3 3,3
SW-TH_K3-2235D-F1 [mm]
  round 1.8 hole 1.2 paste+0 mask+0.051: 1(-2.5,1.7) 2(0,1.7) 3(2.5,1.7) 4(-2.5,-1.7) 5(0,-1.7) 6(2.5,-1.7)
  silkscreen extent -4.57,-1.78 4.57,1.78
SW-TH_SK-12D02-VG5 [mm]
  oval 1.4x1.1 hole 0.7 slot 0.9 at 0 deg copper offset 0,0.001 paste+0 mask+0.051: 1(-2,-0.001)
  oval 1.4x1.1 hole 0.7 slot 0.9 at 0 deg paste+0 mask+0.051: 2(0,0)
  oval 1.4x1.1 hole 0.7 slot 0.9 at 0 deg copper offset 0,-0.001 paste+0 mask+0.051: 3(2,0.001)
  oval 1.2x2 hole 0.7 slot 1.5 at 90 deg copper offset 0.001,0 paste+0 mask+0.051: 4(4.099,0)
  oval 1.2x2 hole 0.7 slot 1.5 at 90 deg copper offset 0,0 paste+0 mask+0.051: 5(-4.1,0)
  silkscreen extent -4.3,-7.25 4.3,2.27
SW-TH_THB001P [mm]
  round 1.8 hole 1.2 paste+0 mask+0.051: 1(7.527,-1.78) 2(7.527,0.76) 3(7.527,3.3) 4(1.337,9.49) 5(-1.203,9.49) 6(-3.743,9.49)
  round 2.5 hole 1.8 paste+0 mask+0.051: 7(-7.527,5.76) 8(-7.527,-4.24) 9(5.123,-4.24) 10(5.123,5.76)
  round 2.2 hole 1.6 paste+0 mask+0.051: a(-4.472,-4.99) b(2.028,-4.99) c(-4.472,-9.49) d(2.028,-9.49)
  silkscreen extent -8.82,-10.58 8.48,10.42
SW-TH_TS-1093C-A9B3-D1 [mm]
  round 1.8 hole 1.2 paste+0 mask+0.051: 1(-2.25,-1.25) 2(2.25,-1.25)
  round 2.3 hole 1.5 paste+0 mask+0.051: 3(-3.6,1.25) 4(3.6,1.25)
  silkscreen extent -4,-8 4,3.32
TEST-TH_BD2.54-P1.39 [mm]
  round 1.9 hole 1.39 paste+0 mask+0.051: 1(0,0)
  silkscreen extent -1.27,-1.27 1.27,1.27
TSM-108-YY-ZZZ-SH [mm]
  rect 1.27x3.18 smd paste+0 mask+0.051: 1(-8.89,0) 2(-6.35,0) 3(-3.81,0) 4(-1.27,0) 5(1.27,0) 6(3.81,0) 7(6.35,0) 8(8.89,0)
  silkscreen extent -10.16,4.01 10.16,6.55
TSSOP-8_L3.0-W3.0-P0.65-LS4.9-BR [mm]
  rect 1.15x0.406 smd paste+0 mask+0.051: 1(2.175,-0.978) 2(2.175,-0.317) 3(2.175,0.318) 4(2.175,0.978) 5(-2.175,0.978) 6(-2.175,0.317) 7(-2.175,-0.318) 8(-2.175,-0.978)
  silkscreen extent -1.6,-1.75 3.25,1.5
US-8_L2.4-W2.1-P0.50-LS3.2-BR [mm]
  oval 0.7x0.3 smd paste+0 mask+0.051: 1(1.45,-0.75) 2(1.45,-0.25) 3(1.45,0.25) 4(1.45,0.75) 5(-1.45,0.75) 6(-1.45,0.25) 7(-1.45,-0.25) 8(-1.45,-0.75)
  silkscreen extent -1.06,-1.5 1.5,1.05
USB-C-SMD_TYPE-C-USB-18 [mm]
  oval 1x2.1 hole 0.6 slot 1.6 at 90 deg paste+0 mask+0.05: 0(4.32,2.45) 1(-4.32,2.45)
  oval 1x2.6 hole 0.6 slot 2.1 at 90 deg paste+0 mask+0.05: 2(-4.32,-2.91) 3(4.32,-2.91)
  rect 0.3x0.8 smd paste-100 mask+0.051: A1(-3,2.91) A2(-2.5,2.91) A3(-2,2.91) A4(-1.5,2.91) A5(-1,2.91) A6(-0.5,2.91) A7(0.5,2.91) A8(1,2.91) A9(1.5,2.91) A10(2,2.91) A11(2.5,2.91) A12(3,2.91)
  rect 1x0.7 smd paste-100 mask+0.05: B1(3.1,1.56)
  rect 0.3x0.7 smd paste-100 mask+0.051: B2(2.25,1.56) B3(1.75,1.56) B4(1.25,1.56) B5(0.75,1.56) B6(0.25,1.56) B7(-0.25,1.56) B8(-0.75,1.56) B9(-1.25,1.56) B10(-1.75,1.56) B11(-2.25,1.56)
  Top Layer region: -3.6,1.91 -2.6,1.91 -2.6,1.21 -3.6,1.21
  silkscreen extent -4.32,-4.68 4.32,2.48
UTQFN-16_L2.6-W1.8-P0.40-BL [mm]
  rect 0.21x0.665 smd paste+0 mask+0.051: 1(-0.6,-0.768) 2(-0.2,-0.768) 3(0.2,-0.768) 4(0.6,-0.768) 9(0.6,0.768) 10(0.2,0.768) 11(-0.2,0.768) 12(-0.6,0.768)
  rect 0.665x0.21 smd paste+0 mask+0.051: 5(1.232,-0.6) 6(1.232,-0.2) 7(1.232,0.2) 8(1.232,0.6) 13(-1.232,0.6) 14(-1.232,0.2) 15(-1.232,-0.2) 16(-1.232,-0.6)
  silkscreen extent -1.3,-1.39 1.3,0.9
VSON-8_L2.0-W1.5-P0.50-BL [mm]
  rect 0.25x0.55 smd paste+0 mask+0.051: 1(-0.75,-0.675) 2(-0.25,-0.675) 3(0.25,-0.675) 4(0.75,-0.675) 5(0.75,0.675) 6(0.25,0.675) 7(-0.25,0.675) 8(-0.75,0.675)
  silkscreen extent -1.1,-1.4 1.1,0.75
VSON-10_L3.0-W3.0-P0.50-TL-EP [mm]
  rect 0.8x0.3 smd paste+0 mask+0.051: 1(-1.5,1) 2(-1.5,0.5) 3(-1.5,0) 4(-1.5,-0.5) 5(-1.5,-1) 6(1.5,-1) 7(1.5,-0.5) 8(1.5,0) 9(1.5,0.5) 10(1.5,1)
  Top Layer region: -0.758,1.191 -0.469,1.191 -0.469,1.706 -0.179,1.706 -0.179,1.191 0.181,1.191 0.181,1.706 0.471,1.706 0.471,1.191 0.761,1.191 0.761,-1.209 0.471,-1.209 0.471,-1.714 0.181,-1.714 0.181,-1.209 -0.179,-1.209 -0.179,-1.714 -0.469,-1.714 -0.469,-1.209 -0.759,-1.209 -0.759,0.886 -0.758,0.886
  silkscreen extent -1.98,-1.5 1.5,1.6

## Via types
v1: diameter 0.579, hole 0.295, Top Layer to Bottom Layer, 184 vias
v2: diameter 0.61, hole 0.305, Top Layer to Bottom Layer, 93 vias
v3: diameter 0.58, hole 0.295, Top Layer to Bottom Layer, 26 vias

## Nets (pads, with @x,y where several pads share a name; then routed paths per layer and width w, separated by ;. In a path a pad name is that pad's centre, name@x,y a point inside that pad or via, vN(x,y) a via of type N, cw(c..) or ccw(c..) an arc to the next point about the centre after c; other vN are vias at no path point)
1V8_EN: C33.1 D2.3 R33.1 U3.9 | length 13.1
  Top Layer w0.25: U3.9@178.499,170.099 178.499,174.544 ; R33.1@179.946,174.6 179.891,174.544 178.499,174.544 ; D2.3@181.5,180.065 180.1,178.665 C33.1@180.1,176.2 179.401,176.2 178.499,175.301 178.499,174.544
1V8_FB: C6.1 R1.1 R2.1 R26.2 R27.1 U3.1 | length 11
  Top Layer w0.25: C6.1@170.199,167.099 170.699,167.099 171.4,167.8 173.399,167.8 173.899,167.3 173.899,166.652 R27.1@173.953,166.599 ; R26.2@173.8,164.853 173.953,165.006 173.953,166.6 174.453,167.1 U3.1@178,167.1
3V3_EN: R32.1 R62.2 U3.7 U33.1 | length 43.1
  Top Layer w0.2: R62.2@169.4,194.4 168.8,193.8 168.8,180.7 171.5,178 v2(178.8,178)
  Top Layer w0.25: U3.7@179.5,170.1 v2(179.5,171.4) 179.5,172.453 R32.1@179.946,172.9
  Bottom Layer w0.25: v2(178.8,178) 179.5,177.3 v2(179.5,171.4) 182.5,174.4 U33.1@186.4,174.4
3V3_FB: R23.2 R25.1 U3.5 | length 8.9
  Top Layer w0.25: U3.5@180,167.1 180,167.3 185.4,167.3 186.152,168.052 R25.1@187.001,168.052 ; R25.1@187,168.053 R23.2@187,169.447
#3V3_AUX_EN: Q1.1 Q10.3 R29.2 | length 5.1
  Top Layer w0.25: Q10.3@163.1,159.7 163.45,160.05 v2(163.45,161.624) Q1.1@163.45,162.75 165.103,162.75 R29.2@165.3,162.947
#APO_CRANK_DETECT: CN1.34 CN1.35 Q21.3 R94.2 | length 83.1
  Top Layer w0.2: v1(251.1,203.5) 251.1,210.4 254.882,214.182 CN1.35@265.284,214.182 CN1.34@265.284,213.782
  Top Layer w0.254: v1(255.1,152) 256.9,152 257.7,151.2 R94.2@257.7,150.1 257.7,147.9 Q21.3@257.2,147.4
  Bottom Layer w0.254: v1(251.1,203.5) 251.1,156 v1(255.1,152)
#APO_SOLAR_DETECT: CN1.6 CN1.7 Q20.3 R92.2 | length 53.4
  Top Layer w0.2: v1(253.9,203.7) 254,203.8 254.5,203.8 255.717,202.582 CN1.6@265.284,202.582 CN1.7@265.284,202.982
  Top Layer w0.25: R92.2@250,168.7 250.3,168.4 v1(252,168.4) 253.5,166.9 Q20.3@253.5,166.2
  Bottom Layer w0.254: v1(252,168.4) 252,201.8 v1(253.9,203.7)
#CRANK2_DETECT: CN1.10 CN1.11 | length 0.4
  Top Layer w0.2: CN1.10@265.284,204.182 CN1.11@265.284,204.582
$1N510: R45.2 SW2.3 | length 3.3
  Top Layer w0.25: R45.2@208.299,133.845 SW2.3@208.322,130.514
$1N681: D2.1 D3.3 | length 2.4
  Top Layer w0.2: D2.1@182.45,182.535 182.83,182.535 D3.3@184.265,181.1
$1N692: LED5.2 Q8.3 | length 2.1
  Top Layer w0.25: LED5.2@154.651,173.6 Q8.3@156.8,173.6
$1N695: LED5.1 R13.1 | length 1.9
  Top Layer w0.25: R13.1@151.053,173.6 LED5.1@152.949,173.6
$1N696: LED6.2 Q9.3 | length 1.9
  Top Layer w0.25: LED6.2@154.651,180.3 Q9.3@156.6,180.3
$1N697: LED6.1 R21.1 | length 1.9
  Top Layer w0.25: R21.1@151.053,180.3 LED6.1@152.949,180.3
$1N700: LED11.2 Q11.3 | length 2.1
  Top Layer w0.25: LED11.2@154.651,167.1 Q11.3@156.8,167.1
$1N701: LED11.1 R82.1 | length 1.9
  Top Layer w0.25: R82.1@151.053,167.1 LED11.1@152.949,167.1
$1N704: LED12.2 Q12.3 | length 2.6
  Top Layer w0.25: LED12.2@172.1,146.851 173.649,146.851 Q12.3@174.4,146.1
$1N707: LED12.1 R83.1 | length 2
  Top Layer w0.25: LED12.1@172.1,145.149 172.147,145.102 R83.1@172.147,143.2
$1N21605: R11.1 R106.2 U55.3 | length 87.1
  Top Layer w0.2: R11.1@134.76,165.03 R11.1@134.86,165.03 ; R11.1@134.86,164.43 R11.1@134.86,165.03 ; R106.2@137.3,176.535 137.3,172.5 134.86,170.06 R11.1@134.86,165.03 ; v1(166.8,184.6) 165.5,185.9 148,185.9 142.1,180 142.1,169.6 137.53,165.03 R11.1@134.86,165.03 ; v1(177.5,184) 178,184 180.8,186.8 183.2,186.8 185.1,188.7 185.1,190.4 186.8,192.1 187.6,192.1 188.05,191.65 U55.3@188.557,191.65
  Bottom Layer w0.2: v1(166.8,184.6) 166.8,184.46 167,184.26 177.239,184.26 v1(177.5,184)
$1N23868: C10.2 R35.1 R37.1 U48.2 | length 7.3
  Top Layer w0.2: R37.1@190.3,183.6 190.7,183.2 190.7,182.8 191.1,182.4 U48.2@191.1,181.8 ; C10.2@191.1,185.5 R35.1@194,185.5
  Top Layer w0.25: R37.1@190.3,183.6 190.3,184.2 191.1,185 C10.2@191.1,185.5
$1N23869: R35.2 U55.4 | length 6.1
  Top Layer w0.2: U55.4@190.242,191.65 190.242,190.857 R35.2@194,187.1
$1N24738: R36.1 R37.2 | length 1.6
  Top Layer w0.2: R37.2@191.9,183.6 R36.1@193.5,183.6
$1N28558: LED1.2 Q5.3 | length 4.2
  Top Layer w0.2: Q5.3@302.1,211.2 LED1.2@302.1,215.4
$1N28559: LED1.1 R44.1 | length 3
  Top Layer w0.2: R44.1@298.9,213 298.9,213.902 LED1.1@300.398,215.4
$1N31257: R11.2 R34.2 U55.1 | length 75.7
  Top Layer w0.2: R11.2@137.4,166.97 138.5,168.07 138.5,175.2 139.8,176.5 139.8,179.5 146.9,186.6 166.4,186.6 v1(168,185) ; R34.2@177.1,189.65 177.2,189.65 177.2,188.5 176.1,187.4 v1(176.1,184.8) 177.9,184.8 180.5,187.4 182.7,187.4 184.4,189.1 184.4,190.7 186.3,192.6 187.5,192.6 187.8,192.9 188.507,192.9 U55.1@188.557,192.95
  Bottom Layer w0.2: v1(168,185) 175.9,185 v1(176.1,184.8)
$3N336: L2.2 U3.6 | length 3.7
  Top Layer w0.25: U3.6@180,170.1 182.628,170.1 L2.2@183.4,169.328
$3N361: L4.1 U3.10 | length 3.8
  Top Layer w0.25: L4.1@176.828,173.4 176.828,171.272 U3.10@178,170.1
$3N420: R24.1 R25.2 | length 2.2
  Top Layer w0.25: R25.2@187.001,166.545 187.252,166.545 188.052,165.748 R24.1@188.052,164.899
$3N652: R27.2 R28.1 | length 2.1
  Top Layer w0.25: R28.1@171.753,164.8 171.753,165.906 R27.2@172.446,166.6
$3N3965: R88.1 SW13.1 U39.4 | length 6
  Top Layer w0.19: U39.4@196.65,150.4 198.721,150.4 R88.1@198.9,150.579
  Top Layer w0.5: R88.1@198.9,150.579 202.379,150.579 SW13.1@202.5,150.7
$3N3966: R88.2 SW13.4 U39.3 | length 6.1
  Top Layer w0.19: U39.3@196.65,147.8 198.721,147.8 R88.2@198.9,147.621
  Top Layer w0.5: R88.2@198.9,147.621 202.179,147.621 SW13.4@202.5,147.3
$3N3967: SW13.3 SW13.6 | length 3.4
  Top Layer w0.5: SW13.6@207.5,147.3 SW13.3@207.5,150.7
$3N14033: H4.1 SW13.5 | length 5.3
  Top Layer w0.5: H4.1@201.8,144 202.9,144 205,146.1 SW13.5@205,147.3
$3N28553: L6.2 U44.1 | length 4.1
  Top Layer w0.3: U44.1@183.217,151.9 186.2,151.9 L6.2@187,151.1
$3N33312: R8.1 R105.1 | length 2.2
  Top Layer w0.25: R105.1@177,150.8 177.6,150.2 R8.1@177.6,148.8
$3N34968: R101.2 R105.2 U44.5 | length 4.4
  Top Layer w0.25: R105.2@177,152.4 R101.2@179.1,152.4 U44.5@181.382,152.4
$3N56381: L7.1 U51.6 | length 6.8
  Top Layer w0.25: U51.6@302.875,226.75 304.149,226.75 304.7,226.2 304.7,223.9 L7.1@303,222.2
$3N57004: C60.1 R107.2 R108.1 U51.2 | length 7.4
  Top Layer w0.25: R108.1@299.1,228.306 299.593,228.306 300.65,227.25 U51.2@301.524,227.25
  Top Layer w0.5: C60.1@296.1,226.7 296.153,226.753 R107.2@296.153,228.3 299.093,228.3 R108.1@299.1,228.306
$3N60043: R30.2 R31.2 | length 3.3
  Top Layer w0.5: R31.2@201.5,190.7 202.3,191.5 R30.2@202.3,193.7
$4N195: LED4.1 R22.2 | length 2.5
  Top Layer w0.2: R22.2@238.2,131.847 238.2,129.449 LED4.1@238.249,129.4
$4N219: R15.1 USBC1.A5 | length 8.3
  Top Layer w0.2: R15.1@240.5,134.7 240.501,135.799 241.601,136.901 244.999,136.901 245.901,135.999 USBC1.A5@245.9,135.01
$4N231: R14.2 USBC1.B5 | length 7.4
  Top Layer w0.2: USBC1.B5@247.65,133.66 247.651,132.55 248.299,131.9 251.999,131.9 R14.2@253.201,133.099
$4N322: C25.1 U24.4 | length 7.8
  Top Layer w0.2: C25.1@240.501,142.4 240.501,142.1 241.7,140.899 245.7,140.899 246.366,141.564 U24.4@246.365,142.464
$6N263: R55.1 SW11.1 | length 3.1
  Top Layer w0.25: SW11.1@165.027,224.22 165.147,224.1 R55.1@168.047,224.1
$6N284: R56.1 SW11.3 | length 3.6
  Top Layer w0.25: SW11.3@165.027,229.3 165.127,229.4 R56.1@168.547,229.4
$6N285: R57.1 SW11.4 | length 2.8
  Top Layer w0.25: SW11.4@158.837,235.49 158.837,238.084 R57.1@159,238.247
$6N286: R58.1 SW11.6 | length 2.7
  Top Layer w0.25: R58.1@153.6,238.147 153.757,237.989 SW11.6@153.757,235.49
$8N135: R65.1 R67.2 U7.3 | length 7.1
  Top Layer w0.25: U7.3@165.75,136.351 164.353,137.748 164.353,139 R65.1@168.247,139
$8N146: R41.2 R71.1 U9.3 | length 6.5
  Top Layer w0.25: R41.2@156.4,138.9 156.5,139 158.1,139 ; U9.3@157.05,136.4 157.05,137.95 158.1,139 ; R71.1@159.847,139 158.1,139
$8N176: R66.2 R69.1 R73.1 U10.3 | length 8.8
  Top Layer w0.25: R66.2@146.953,139 149.218,139 ; U10.3@148.75,136.351 148.75,138.532 149.218,139 ; R69.1@151.547,140.4 151.547,139 149.218,139
$8N217: R41.1 R69.2 R73.2 | length 2.8
  Top Layer w0.25: R69.2@153.053,140.4 153.053,139 R41.1@154.447,139
$8N248: R66.1 R70.2 U8.3 | length 9.3
  Top Layer w0.25: R70.2@139.153,139 141.382,139 ; U8.3@140.45,136.351 140.45,138.068 141.382,139 ; R66.1@145.447,139 141.382,139
$8N259: R81.2 U7.1 U8.1 U9.1 U10.1 | length 34.8
  Top Layer w0.25: U8.1@141.75,136.351 141.751,137.051 142.2,137.5 v2(142.4,137.5) ; U10.1@150.05,136.351 150.05,137.05 150.5,137.5 v2(151.2,137.5) ; U9.1@158.35,136.4 158.349,137.15 v2(158.7,137.5) ; R81.2@167,141.547 167,140.6 v2(167.1,140.5) ; U7.1@167.05,136.351 167.1,136.401 v2(167.1,137.5)
  Bottom Layer w0.25: v2(142.4,137.5) v2(151.2,137.5) v2(158.7,137.5) v2(167.1,137.5) v2(167.1,140.5)
$8N314: LED7.1 R74.1 | length 4.2
  Top Layer w0.25: LED7.1@168,129.6 168.553,129.047 R74.1@172,129.047
$8N355: LED10.1 R76.1 | length 3.9
  Top Layer w0.2: LED10.1@143,129.499 143.201,129.499 143.653,129.047 R76.1@146.7,129.047
$8N356: LED9.1 R75.1 | length 3.9
  Top Layer w0.25: LED9.1@151.333,129.5 151.786,129.047 R75.1@155,129.047
$8N357: LED8.1 R68.1 | length 3.6
  Top Layer w0.25: LED8.1@159.701,129.499 160.3,129.499 160.653,129.146 R68.1@163.2,129.147
$8N358: LED7.2 U7.4 | length 4.6
  Top Layer w0.25: U7.4@165.75,134.151 165.75,129.65 LED7.2@165.8,129.6
$8N359: LED8.2 U9.4 | length 4.9
  Top Layer w0.25: U9.4@157.05,134.2 157.05,129.95 LED8.2@157.5,129.5
$8N360: LED9.2 U10.4 | length 4.8
  Top Layer w0.25: U10.4@148.75,134.151 148.75,129.883 LED9.2@149.133,129.5
$8N361: LED10.2 U8.4 | length 4.8
  Top Layer w0.25: U8.4@140.45,134.151 140.45,129.85 LED10.2@140.8,129.5
$8N362: Q2.3 R68.2 R74.2 R75.2 R76.2 | length 31.1
  Top Layer w0.2: R76.2@146.924,130.824 146.7,131.048 146.7,131.1 v1(147,131.4) ; R75.2@155,130.6 155,131.2 v1(155.3,131.5) ; R68.2@163.2,130.7 163.5,130.7 v1(164.3,131.5) ; v1(170.8,130.7) 171.9,130.7 R74.2@172,130.6 ; R74.2@172.372,130.6 Q2.3@174.85,130.6
  Bottom Layer w0.2: v1(147,131.4) 147.1,131.5 v1(155.3,131.5) v1(164.3,131.5) 170,131.5 v1(170.8,130.7)
$8N515: R12.1 SW12.2 | length 2.1
  Top Layer w0.7: SW12.2@182.4,130.9 183.8,132.3 R12.1@183.8,132.4
$8N518: R67.1 R71.2 | length 1.5
  Top Layer w0.25: R71.2@161.353,139 R67.1@162.847,139
$9N7164: R17.2 R93.1 | length 2.1
  Top Layer w0.25: R93.1@254.2,170.3 R17.2@256.3,170.3
$9N7914: R95.2 R96.1 | length 2.2
  Top Layer w0.254: R96.1@261.6,146.1 261.7,146 R95.2@261.7,143.9
$11N45631: CN7.34 CN7.36 Q3.2 R43.2 | length 22.5
  Top Layer w0.2: Q3.2@158.85,195.15 158.85,196.95 R43.2@158.9,197 158.9,197.9 159.4,198.4 164.1,198.4 v1(164.2,198.3) ; v1(175.5,198.9) 175.7,199.1 CN7.34@177.61,199.1 CN7.36@177.61,198.7
  V+ w0.2: v1(164.2,198.3) 164.6,198.7 175.3,198.7 v1(175.5,198.9)
$11N49394: Q3.1 Q4.3 R43.1 | length 4.2
  Top Layer w0.2: R43.1@160.5,197 160.75,196.75 Q3.1@160.75,195.15 162.128,193.771 Q4.3@162.471,193.771
APO_1V8_EN: CN8.74 CN8.75 D2.2 | length 86.6
  Top Layer w0.2: v2(209.8,197) 211,198.2 211,205.1 213.6,207.7 v1(234.2,207.7) ; CN8.75@238.484,210.582 CN8.74@238.484,210.982 244.317,210.982 v1(244.3,211)
  Top Layer w0.25: D2.2@180.55,182.535 180.6,182.585 v2(180.6,183.9)
  Bottom Layer w0.2: v1(234.2,207.7) 241,207.7 v1(244.3,211)
  Bottom Layer w0.25: v2(180.6,183.9) 180.7,184 189.8,184 200.5,194.7 207.4,194.7 209.7,197 v2(209.8,197)
APO_3V3_LA_EN: CN8.34 CN8.35 R62.1 U37.1 | length 84.1
  Top Layer w0.2: R62.1@169.5,196.1 169.5,200.9 181.9,213.3 193.5,213.3 197.5,217.3 197.5,219.5 U37.1@197.8,219.8 199.8,221.8 203.7,221.8 211.317,214.182 CN8.35@235.284,214.182 CN8.34@235.284,213.782
APO_AUTO_TURN_ON_EN: CN8.26 CN8.27 Q13.1 R9.1 | length 47.2
  Top Layer w0.2: Q13.1@191.55,205.2 R9.1@193.5,205.2 193.5,206.4 194.3,207.2 197.1,207.2 198.5,208.6 198.6,208.6 v1(200.7,210.7) ; v1(213.4,210.8) 235.102,210.8 CN8.27@235.284,210.982 CN8.26@235.284,210.582
  Bottom Layer w0.2: v1(200.7,210.7) 200.8,210.8 v1(213.4,210.8)
APO_AUTO_TURN_ON_EN_5V: Q13.3 R60.2 U56.2 | length 38.1
  Top Layer w0.127: 176.8,192.4 177.245,191.954 177.245,191.222 177.223,191.2 v1(177.2,191.2)
  Top Layer w0.2: U56.2@171.417,186.575 171.417,187.317 171.7,187.6 172.4,187.6 172.7,187.3 172.7,186.7 173,186.4 v1(173.6,186.4) ; v2(189.1,198.6) 189.1,201.7 Q13.3@190.6,203.2
  Bottom Layer w0.2: v1(173.6,186.4) 173.2,186.4 173,186.6 173,191 173.7,191.7 176.7,191.7 ; v1(177.2,191.2) 176.7,191.7 ; v2(189.1,198.6) 189,198.7 179.5,198.7 176.7,195.9 176.7,191.7
APO_AUTO_TURN_ON_LATCH_OUT: R5.1 U48.1 U56.5 | length 38
  Top Layer w0.2: U56.5@170.122,182.225 170.122,184.778 169.5,185.4 169.5,190.1 170.4,191 R5.1@172.9,191 173.1,190.8 v1(174,190.8) ; v1(184.4,185.6) 185.5,185.6 186.3,184.8 v1(186.3,183) ; U48.1@192.05,181.8 192.25,181.6 v1(193,181.6)
  Bottom Layer w0.2: v1(174,190.8) 179.2,185.6 v1(184.4,185.6) ; v1(186.3,183) 191.6,183 v1(193,181.6)
APO_BTT_LOG2CAPS: CN8.62 CN8.63 Q4.1 R42.1 | length 128
  Top Layer w0.2: v1(159,191.4) 166.1,191.4 166.8,192.1 166.8,193 R42.1@166.7,193.1 166.422,192.822 Q4.1@164.471,192.822 ; v1(186.5,223.4) 195.7,223.4 198.8,226.5 201.8,226.5 213.3,215 v1(234.2,215) ; CN8.63@238.484,215.382 CN8.62@238.484,215.782 244.382,215.782 v1(244.8,216.2)
  V+ w0.2: v1(159,191.4) 159,198.3 184.1,223.4 v1(186.5,223.4)
  Bottom Layer w0.2: v1(234.2,215) 243.6,215 v1(244.8,216.2)
APO_BUTT_1: CN1.66 CN1.67 CN2.9 CN2.11 R50.2 SW5.1 | length 260.8
  Top Layer w0.2: CN2.11@150.99,203.5 CN2.9@150.99,203.9 163.9,203.9 182.5,222.5 v3(195.1,222.5) ; CN1.67@268.484,213.782 CN1.66@268.484,214.182 275.682,214.182 278.1,216.6 278.1,238.8 v3(280.9,241.6) 323.4,241.6 337.699,227.3 343.999,227.3 R50.2@344.099,227.4 350.4,227.4 SW5.1@351.95,228.95
  Bottom Layer w0.19: v3(195.1,222.5) 203.2,222.5 216.98,236.28 251.18,236.28 256.5,241.6 v3(280.9,241.6)
APO_BUTT_2: CN1.62 CN1.63 CN2.17 CN2.19 R48.2 SW7.1 | length 244.9
  Top Layer w0.127: CN2.19@150.99,201.9 CN2.17@150.99,202.3
  Top Layer w0.2: CN2.17@150.99,202.3 163.5,202.3 182.8,221.6 196,221.6 198.4,224 v1(201,224) ; CN1.63@268.484,215.382 CN1.62@268.484,215.782 275.282,215.782 277,217.5 277,239.5 280.5,243 v3(280.9,243) ; R48.2@331.799,239.7 331.846,239.7 337.7,239.7 SW7.1@339.45,241.45
  Top Layer w0.25: v3(280.9,243) 328.453,243 331.799,239.653 R48.2@331.846,239.7
  Bottom Layer w0.25: v1(201,224) 214.8,237.8 251.3,237.8 256.5,243 v3(280.9,243)
APO_BUTT_3: CN1.90 CN1.91 CN2.25 CN2.27 R49.2 SW4.1 | length 229.9
  Top Layer w0.127: CN2.27@150.99,200.3 CN2.25@150.99,200.699 164.9,200.699 179.5,215.3 191.5,215.3 v1(194.1,217.9)
  Top Layer w0.2: v1(260.1,231.4) 260.1,228.6 v1(260.4,228.3) ; CN1.91@268.484,204.182 CN1.90@268.484,204.582 270.782,204.582 v1(271.4,205.2) ; 321.55,228.95 SW4.1@326.95,228.95
  Top Layer w0.25: v3(279.9,231.2) 284.6,235.9 310.353,235.9 319,227.253 320.696,228.95 321.55,228.95
  Bottom Layer w0.19: v1@194,217.9 207.7,217.9 221.2,231.4 v1@260.094,231.4 ; v1(260.1,231.4) 260.3,231.2 v3(279.9,231.2)
  Bottom Layer w0.2: v1@260.094,231.4 v1(260.1,231.4) ; v1(260.4,228.3) 263.1,225.6 263.1,215.9 271.4,207.6 v1(271.4,205.2)
APO_BUTT_4: CN1.94 CN1.95 CN2.33 CN2.35 R51.2 SW6.1 | length 246.4
  Top Layer w0.127: CN2.35@150.99,198.7 CN2.33@150.99,199.1 165.8,199.1 181.3,214.6 192.9,214.6 v1(194.9,216.6)
  Top Layer w0.2: CN1.95@268.484,202.582 CN1.94@268.484,202.982 269.782,202.982 v1(270.2,203.4) ; 334.05,216.45 SW6.1@339.45,216.45
  Top Layer w0.25: v3(280.9,229.5) 285.8,234.4 306,234.4 318.9,221.5 324.853,221.5 331.599,214.753 333.296,216.45 334.05,216.45
  Bottom Layer w0.127: v1(194.9,216.6) 210.9,216.6 211,216.5
  Bottom Layer w0.19: 211,216.5 224.042,229.542 280.857,229.542 v3(280.9,229.5)
  Bottom Layer w0.2: 256.958,229.541 262.1,224.4 262.1,214.7 270.2,206.6 v1(270.2,203.4)
APO_BUTT_5: CN1.58 CN1.59 CN2.34 CN2.36 R53.2 SW8.1 | length 261.3
  Top Layer w0.127: v1(147.3,199.1) CN2.34@148.61,199.1 CN2.36@148.61,198.7 ; v1(165.597,199.997) 165.597,200.297 v1(179.9,214.6)
  Top Layer w0.2: CN1.59@268.484,216.982 CN1.58@268.484,217.382 274.782,217.382 275.8,218.4 275.8,239.7 280.3,244.2 v1(280.9,244.2) 328.199,244.2 333.399,249.4 333.399,255.7 334.499,256.8 R53.2@336.699,256.8 336.699,258.1 338.121,259.521 SW8.1@340.86,259.521
  Bottom Layer w0.127: v1(147.3,199.1) 164.7,199.1 v1(165.597,199.997)
  Bottom Layer w0.25: v1(179.9,214.6) 185.6,214.6 210.1,239.1 250.3,239.1 255.4,244.2 v1(280.9,244.2)
APO_BUTT_6: CN2.26 CN2.28 CN8.54 CN8.55 R52.2 SW9.1 | length 197.9
  Top Layer w0.127: v1(147.1,200.7) CN2.26@148.61,200.699 CN2.28@148.61,200.3
  Top Layer w0.2: SW9.1@148.55,259.549 151.3,256.8 R52.2@151.3,255.5 152.7,255.5 153.3,254.9 184.4,254.9 186.9,252.4 v3(186.9,251.7) 186.9,240.6 193,234.5 206.1,234.5 217.6,223 240.1,223 241.3,221.8 241.3,219.7 240.582,218.982 CN8.54@238.484,218.982 CN8.55@238.484,218.582
  Bottom Layer w0.25: v1(147.1,200.7) 158.7,200.7 186.9,228.9 v3(186.9,251.7)
APO_BUTT_7: CN2.18 CN2.20 CN8.38 CN8.39 | length 109.6
  Top Layer w0.127: v1(147,202.3) CN2.18@148.61,202.3 CN2.20@148.61,201.9
  Top Layer w0.2: v1(161.9,213.8) 167.3,219.2 170.9,219.2 179.8,228.1 202.6,228.1 214.918,215.782 CN8.39@235.284,215.782 CN8.38@235.284,215.382
  Bottom Layer w0.127: v1(147,202.3) 155.7,202.3 161.9,208.5 v1(161.9,213.8)
APO_JOY_1: CN7.2 CN7.4 CN8.42 CN8.43 SW11.2 | length 130.9
  Top Layer w0.127: CN7.4@177.61,205.1 CN7.2@177.61,205.5 180.51,208.4 v1(181.1,208.4) ; v1(178,224.2) 184,224.2 v1(184.3,224.5) ; v1(180.9,218.3) 180.9,217.8 182.8,215.9 v1(189,215.9)
  Top Layer w0.2: SW11.2@165.027,226.76 171.56,226.76 v1(175,230.2) ; v1(180.9,230.1) 203.3,230.1 216.017,217.382 CN8.43@235.284,217.382 CN8.42@235.284,216.982
  Bottom Layer w0.127: SW11.2@165.027,226.76 175.44,226.76 v1(178,224.2) ; v1(180.9,218.3) 184.3,221.7 v1(184.3,224.5) ; v1(181.1,208.4) 181.3,208.4 188.8,215.9 v1(189,215.9)
  Bottom Layer w0.2: v1(175,230.2) 175.1,230.1 v1(180.9,230.1)
APO_JOY_2: CN7.10 CN7.12 CN8.46 CN8.47 SW11.5 | length 130.8
  Top Layer w0.127: v1(169.5,213.2) 169.7,213.2 v1(170.9,212) ; v1(175.8,204.3) 176.2,203.9 CN7.10@177.61,203.9 CN7.12@177.61,203.5
  Top Layer w0.2: 157.2,233.1 159.4,233.1 161.2,234.9 v1(165.7,234.9) ; v1(183,232.2) 183.2,232 204.6,232 217.617,218.982 CN8.47@235.284,218.982 CN8.46@235.284,218.582
  Top Layer w0.25: SW11.5@156.297,235.49 156.3,235.487 156.3,234 157.2,233.1 v3(157.2,220)
  Bottom Layer w0.127: v3(157.2,220) 158.5,218.7 162,218.7 167.5,213.2 v1(169.5,213.2) ; v1(170.9,212) 175.8,207.1 v1(175.8,204.3)
  Bottom Layer w0.2: v1(165.7,234.9) 168.4,232.2 v1(183,232.2)
APO_JOY_ON: CN8.58 CN8.59 R55.2 R57.2 | length 119.8
  Top Layer w0.2: R57.2@159,239.753 161.346,239.753 v3(161.4,239.7) ; v3(183.9,236) v1(188.3,236) ; v1(193.6,236.9) 193.7,237 210,237 222.8,224.2 240.6,224.2 242.8,222 242.8,218.8 241.382,217.382 CN8.58@238.484,217.382 CN8.59@238.484,216.982
  Top Layer w0.25: R55.2@169.553,224.1 172,224.1 v3(183.9,236)
  Bottom Layer w0.2: v3(161.4,239.7) 180.2,239.7 v3(183.9,236) ; v1(188.3,236) 192.7,236 v1(193.6,236.9)
APO_LATCH_STORE: CN8.30 CN8.31 Q6.1 R4.1 U38.1 | length 31.2
  Top Layer w0.2: R4.1@206.7,211.8 206.8,211.9 Q6.1@206.8,213.55 210.65,213.55 211.5,212.7 232.6,212.7 232.8,212.5 235.158,212.5 235.284,212.373 ; CN8.30@235.284,212.182 235.284,212.373 ; CN8.31@235.284,212.582 235.284,212.373
APO_LATCH_STORE_5V: Q6.3 R46.2 U56.1 | length 57.5
  Top Layer w0.2: U56.1@172.078,186.575 174.1,184.553 v1(174.1,183.5) ; v1(177.4,185.6) 177.8,185.6 180.1,187.9 182.2,187.9 183.8,189.5 183.8,191.3 183.5,191.6 182.5,191.6 181.7,192.4 181.7,194.1 185.3,197.7 185.3,203.8 195.8,214.3 R46.2@202.2,214.3 202.4,214.5 Q6.3@204.8,214.5
  V+ w0.2: v1(174.1,183.5) 174.1,183.9 175.8,185.6 v1(177.4,185.6)
APO_POWER_BUTT: CN8.82 CN8.83 Q7.3 R38.2 | length 52.3
  Top Layer w0.2: Q7.3@204.1,200.5 204.1,201.9 R38.2@204.2,202 205.7,202 207.4,203.7 v1(207.4,205.4) ; v1(224.5,205.3) 224.6,205.4 v1(234.2,205.4) ; CN8.83@238.484,207.382 CN8.82@238.484,207.782 244.217,207.782 v1(244.8,207.2)
  Bottom Layer w0.2: v1(207.4,205.4) 207.5,205.3 v1(224.5,205.3) ; v1(234.2,205.4) 243,205.4 v1(244.8,207.2)